# Altium PCB 0028.PcbDoc
Units mm, origin at the board's own origin, x right, y up, seen from the top; angles counter-clockwise.
Board outline 152.4 x 101.6 mm, 2 copper layers (Top Layer, Bottom Layer); 7 components, 4 nets, 14 pads, 18 vias.
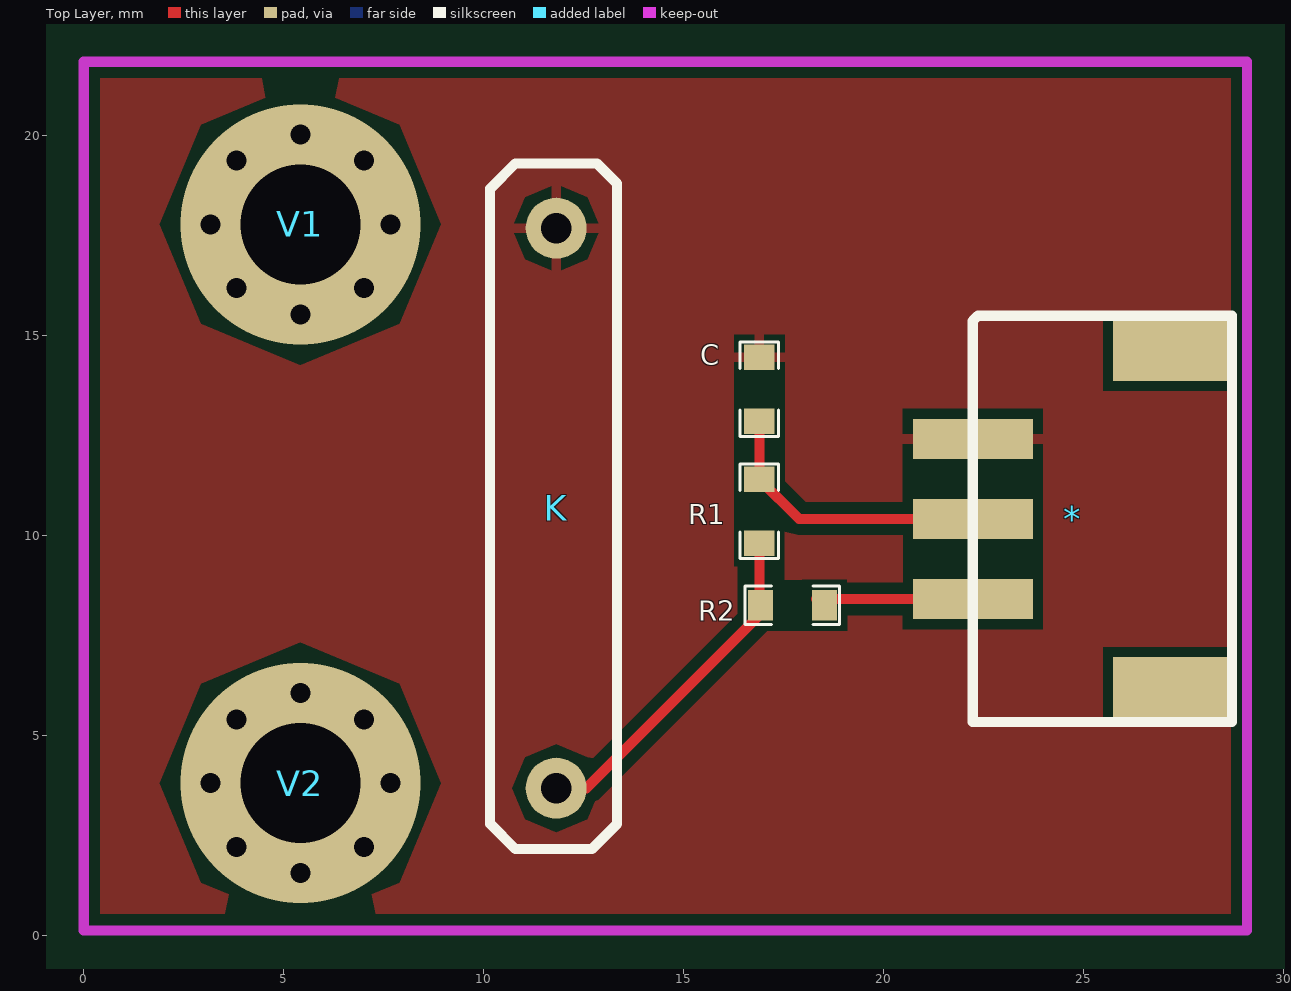
[diagram p0: Top Layer view]
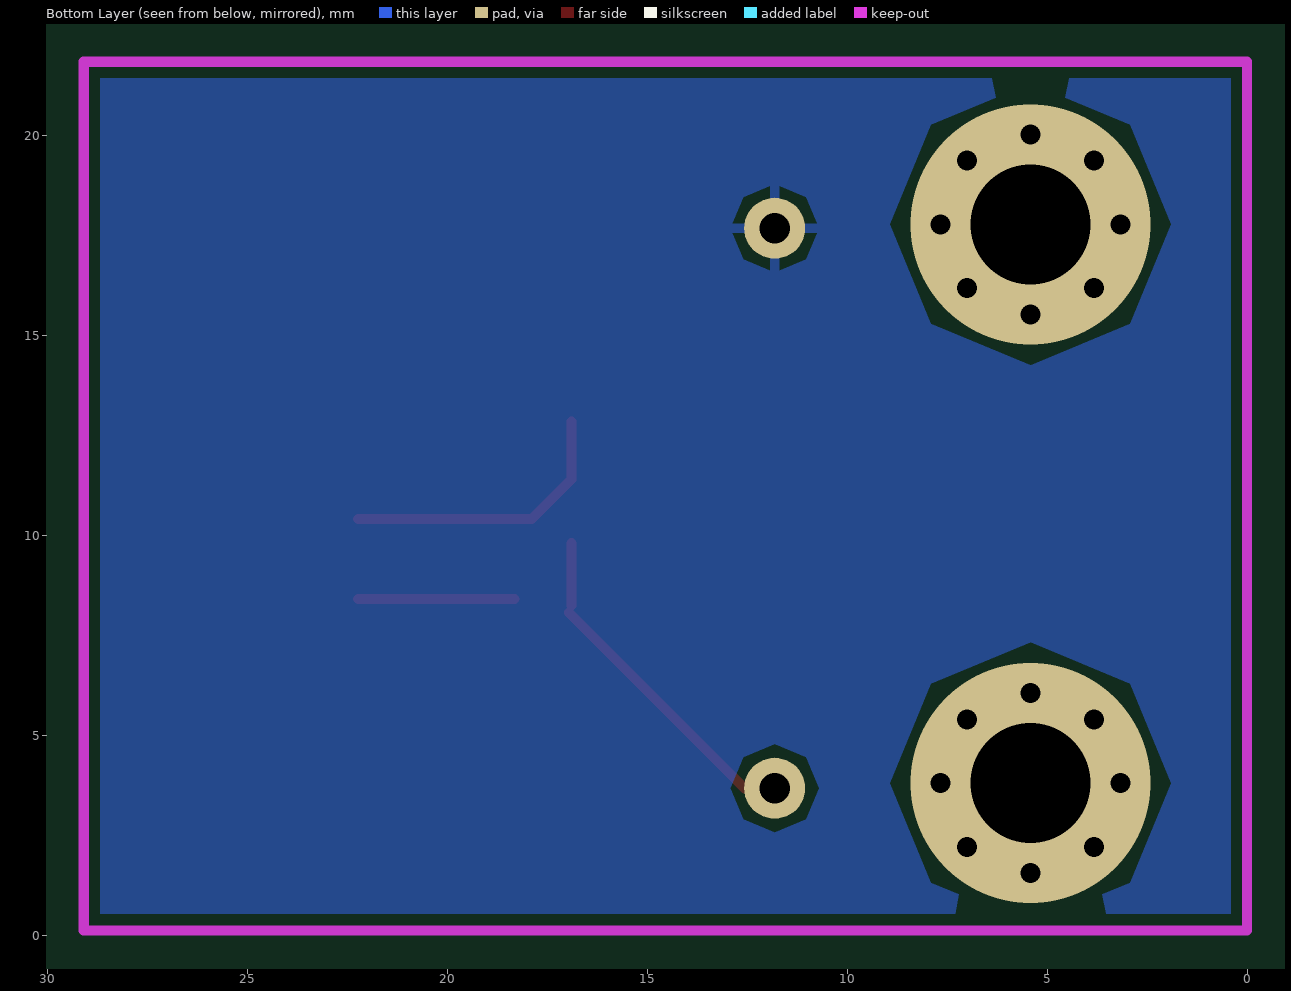
[diagram p1: Bottom Layer view, seen from below]

## Layer stack, top to bottom
Top Layer: signal copper 0.0356
Dielectric: dielectric 0.32, FR-4, Dk 4.8
Bottom Layer: signal copper 0.0356

## Board outline
-58.293,-51.435 94.107,-51.435 94.107,50.165 -58.293,50.165

## Design rules (kind name [scope] priority, off if disabled: settings)
Clearance [All] p1: gap=0.254
PolygonConnect [All] p1: connectstyle=Relief reliefconductorwidth=0.254 reliefentries=4 polygonreliefangle="90 Angle"
RoutingVias [All] p1: holewidth=0.711 width=1.27 viastyle="Through Hole" minholewidth=0.711 minwidth=1.27 maxholewidth=0.711 maxwidth=1.27
SilkscreenOverComponentPads [All] p1: minsilkscreentomaskgap=0.254
SolderMaskExpansion [All] p1: expansion=0.102
Width [All] p1: maxlimit=0.254 minlimit=0.254 preferedwidth=0.254
27 further rules are at their usual default settings.

## Classes and differential pairs
component class 0028: * K V1 V2

## Components (designator, comment, footprint, x,y, rotation, side; value= is the part's Value field where it differs from the comment)
* "sh-2.0" sh-2.0 22.225,10.414 r90 top
C "Comment" 0603E 16.891,12.954 r90 top
K "SW-200D" SW-200D 11.811,3.683 r90 top
R1 "Comment" 0603E 16.891,9.906 r90 top
R2 "Comment" 0603E 17.018,8.255 r0 top
V1 "Via" Via 5.413,17.78 r0 top
V2 "Via" Via 5.413,3.81 r0 top

## Footprints (in the part's own frame and the unit in brackets; to place one, negate y for a bottom-side part, rotate by r counter-clockwise, add the part's x,y. Pads: shape width x height; smd on the part's side, far side on the other; paste and mask are expansions set on the pad)
0603E [mm]
  rect 0.635x0.762 smd: 1(-0.1,0) 2(1.5,0)
  silkscreen extent -0.48,-0.48 1.88,0.48
sh-2.0 [mm]
  rect 1x3 smd: 1(-2,0) 2(0,0) 3(2,0) 3(2,0)
  rect 1.5x3 smd: GND(-4.2,-5) GND(4.2,-5)
  silkscreen extent -5.08,-6.48 5.08,0
SW-200D [mil]
  round 60 hole 30: 2(0,0) 3(551.18,0)
  silkscreen extent -60,-60 615,65
Via [mm]

## Via types
v1: diameter 1, hole 0.5, Top Layer to Bottom Layer, 16 vias
v2: diameter 6, hole 3, Top Layer to Bottom Layer, 2 vias

## Nets (pads, with @x,y where several pads share a name; then routed paths per layer and width w, separated by ;. In a path a pad name is that pad's centre, name@x,y a point inside that pad or via, vN(x,y) a via of type N, cw(c..) or ccw(c..) an arc to the next point about the centre after c; other vN are vias at no path point)
+5: *.2 C.1 R1.2 | length 7.2
  Top Layer w0.254: C.1 R1.2 17.883,10.414 *.2
GND: *.3 C.2 K.3
Net*_1: *.1 R2.2 | length 3.9
  Top Layer w0.254: R2.2@18.312,8.414 *.1
NetK_2: K.2 R1.1 R2.1 | length 8.5
  Top Layer w0.254: K.2 12.565,3.683 R2.1@16.95,8.069 ; R2.1@16.891,8.255 R1.1
pads on no net: *.GND
copper on no net:
  other v1: 5.413,1.56 3.822,2.219 7.004,2.219 3.163,3.81 7.663,3.81 3.822,5.401 7.004,5.401 5.413,6.06 5.413,15.53 3.822,16.189 7.004,16.189 3.163,17.78 7.663,17.78 3.822,19.371 7.004,19.371 5.413,20.03
  other v2: 5.413,3.81 5.413,17.78

## Polygon pours and split planes (outlines as drawn)
GND on Top Layer "Top Layer-No Net" (solid, pour order 4): 0,21.844 29.083,21.844 29.083,0.254 0.127,0.254 0,0.127
GND on Bottom Layer "Top Layer-No Net" (solid, pour order 6): 0,21.844 29.083,21.844 29.083,0.254 28.956,0.127 0,0.127

## Keep-outs
Keep-Out Layer:
  lines w0.254: 0,0.127 0,21.844 29.083,21.844 29.083,0.127 0,0.127

## Silkscreen, mask and mechanical layers (free items; w line width, h text height)
Top Solder:
  text "Digital Vibration" at 14.859,1.397 h0.8